# EAGLE board PM_DC_v0.2 (EAGLE 9.6.2)
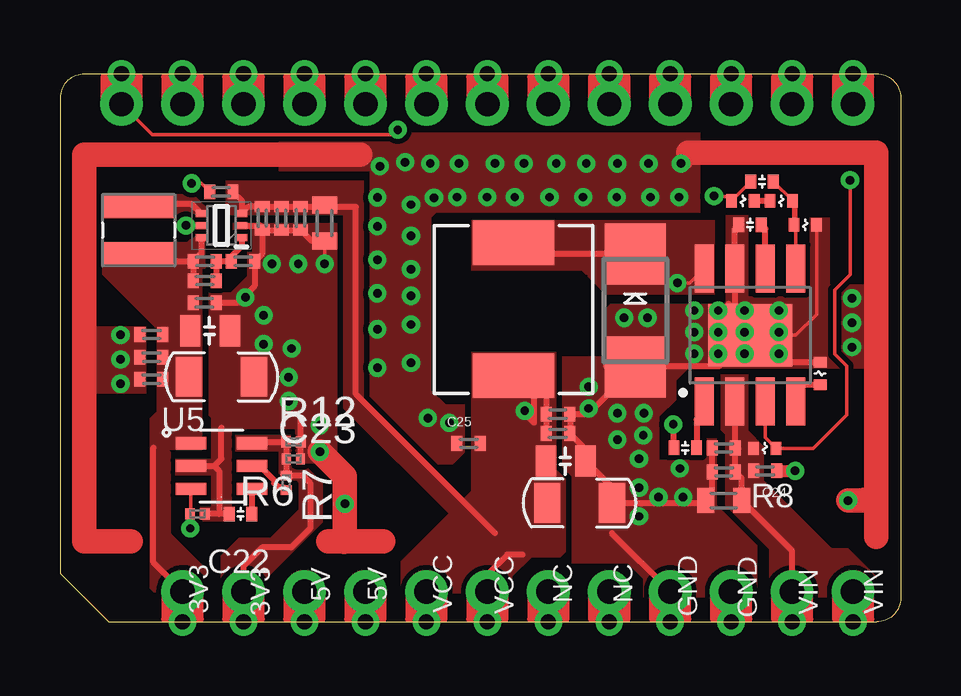
[diagram p0: board, top side]
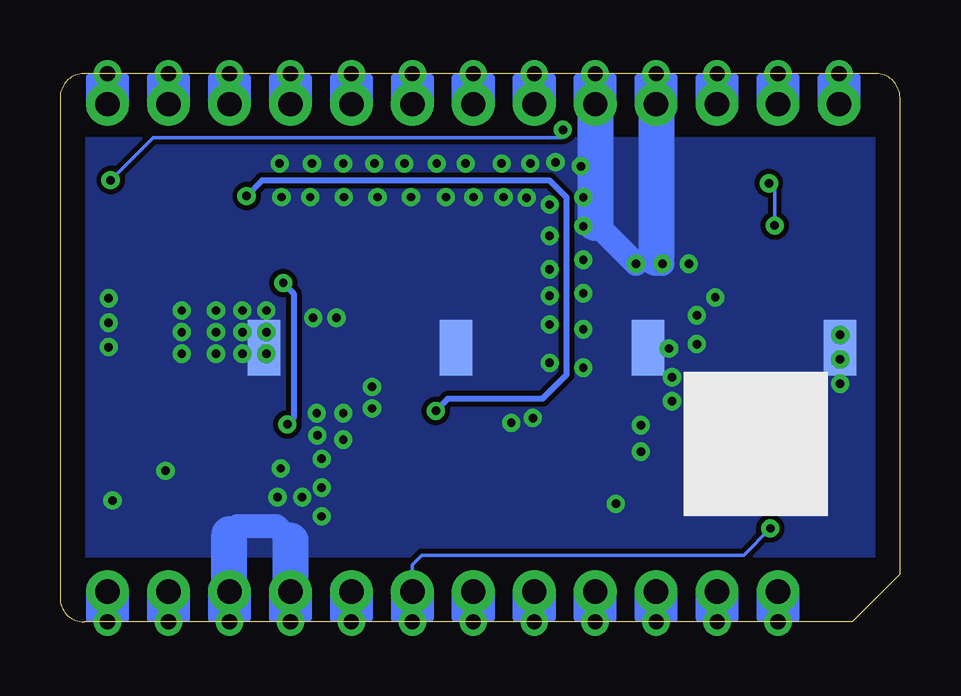
[diagram p1: board, bottom side, seen from below]

Size 35 x 22.86 mm. Coordinates in mm from the lower left corner, seen from the top.
Outline: 2,0 34,0 arc90 35,1 35,21.86 arc90 34,22.86 1,22.86 arc90 0,21.86 0,2 2,0
Copper layers (1*16): Top 0.035mm / dielectric 1.5mm / Bottom 0.035mm
Design rules "default *": minimum track width 6mil, minimum drill 12mil, track to track 8mil, track to pad 6mil, pad to pad 6mil, via to via 6mil, smd to smd 6mil, copper to edge 40mil, drill to drill 6mil, minimum pad ring 10mil, minimum via ring 8mil, stop-mask expansion 4mil, vias tented up to drill 20mil, thermal gap 10mil
Net classes: 0 default: width 0.152 mm, drill 0.203 mm, clearance 0.152 mm; 1 power: width 0.254 mm, drill 0.61 mm, clearance 0.203 mm; 3 BAT: clearance 0.203 mm; 4 3V3: width 0.305 mm, clearance 0.508 mm; 6 +3V3: width 0.203 mm, clearance 0.152 mm

## Footprints (pad centres in the part's own frame; a part is rotated, then mirrored left to right if it is on the bottom)
C0402 = smd 0.45 x 0.6: 1 -0.47,0; 2 0.47,0
C0603_B = smd 0.711 x 1.041: 1 -0.749,0; 2 0.749,0
C0402_B = smd 0.457 x 0.61: 1 -0.483,0; 2 0.483,0
C0805 = smd 0.85 x 1.3: 1 -0.8,0; 2 0.85,0
C1206 = smd 1.1 x 1.65: 1 -1.35,0; 2 1.35,0
C0201-N = smd 0.37 x 0.45: 1 -0.295,0; 2 0.295,0
SMADIODE = smd 2.54 x 2.54: A 2.349,0; C -2.349,0
1X13-CASTELLATED = drill 1.016 pad 1.778: 1 0,-15.24; 2 0,-12.7; 3 0,-10.16; 4 0,-7.62; 5 0,-5.08; 6 0,-2.54; 7 0,0; 8 0,2.54; 9 0,5.08; 10 0,7.62; 11 0,10.16; 12 0,12.7; 13 0,15.24 | drill 0.635 pad 1.016: @1 1.27,-15.24; @2 1.27,-12.7; @3 1.27,-10.16; @4 1.27,-7.62; @5 1.27,-5.08; @6 1.27,-2.54; @7 1.27,0; @8 1.27,2.54; @9 1.27,5.08; @10 1.27,7.62; @11 1.27,10.16; @12 1.27,12.7; @13 1.27,15.24
1X12-CASTELLATED = drill 1.016 pad 1.778: 1 0,-13.97; 2 0,-11.43; 3 0,-8.89; 4 0,-6.35; 5 0,-3.81; 6 0,-1.27; 7 0,1.27; 8 0,3.81; 9 0,6.35; 10 0,8.89; 11 0,11.43; 12 0,13.97 | drill 0.635 pad 1.016: @1 1.27,-13.97; @2 1.27,-11.43; @3 1.27,-8.89; @4 1.27,-6.35; @5 1.27,-3.81; @6 1.27,-1.27; @7 1.27,1.27; @8 1.27,3.81; @9 1.27,6.35; @10 1.27,8.89; @11 1.27,11.43; @12 1.27,13.97
INDUCTOR-VLS-E = smd 1 x 3: P$1 -1,0; P$2 1,0
INDCUTOR_SPM6530 = smd 1.85 x 3.4: 1 -2.775,0; 2 2.775,0
R0402_B = smd 0.457 x 0.61: 1 -0.483,0; 2 0.483,0
R-0402S = smd 0.45 x 0.55: 1 -0.47,0; 2 0.47,0
R0201-N = smd 0.4 x 0.45: 1 -0.305,0; 2 0.305,0
SO_POWERPAD_8 = smd 0.8 x 2: 1 -1.905,-2.775; 2 -0.635,-2.775; 3 0.635,-2.775; 4 1.905,-2.775; 5 1.905,2.775; 6 0.635,2.775; 7 -0.635,2.775; 8 -1.905,2.775 | smd 3.5 x 2.6: EP 0,0
SOTFL50P160X60-6N = smd 0.475 x 0.3: 1 -0.838,0.5; 2 -0.838,0; 3 -0.838,-0.5; 4 0.838,-0.5; 5 0.838,0; 6 0.838,0.5
SOT-23-6 = smd 1.27 x 0.508: 1 -1.27,0.953; 2 -1.27,0; 3 -1.27,-0.953; 4 1.27,-0.953; 5 1.27,0; 6 1.27,0.953
TP_2.33X1.37 = smd 1.37 x 2.33: 1 0,0

## Placement (x,y rotation side)
C1  0.1uF  [C0402]  26.03,7.26 180 top
C2  10uF  [C0603_B]  11,16.63 270 top
C3  33pF  [C0402_B]  3.78,10.11 0 top
C4  0.027uF  [C0402]  28.73,16.56 180 top
C5  22UF  [C0805]  21.03,6.71 0 top
C6  0.1uF  [C0402_B]  10,16.83 90 top
C7  0.1uF  [C0402_B]  6,13.3 180 top
C8  NC-33pF  [C0402]  29.23,18.36 180 top
C9  0.1uF  [C0402_B]  27.63,6.26 0 top
C10  1000pF  [C0402_B]  27.63,7.26 0 top
C11  0.1uF  [C0402_B]  20.73,8.66 180 top
C12  1000pF  [C0402_B]  20.73,7.86 180 top
C13  nc  [C0402_B]  6,14.23 0 top
C14  10uF  [C0805]  6.2,12.14 0 top
C15  100uF  [C1206]  6.7,10.22 0 top
C16  22uF  [C0603_B]  27.63,5.06 180 top
C17  100uF  [C1206]  21.63,4.96 0 top
C18  100pF  [C0402_B]  3.78,11.98 0 top
C19  1000pF  [C0402_B]  8.4,16.83 90 top
C20  100pF  [C0402_B]  9.2,16.83 90 top
C21  1nF  [C0402_B]  3.78,11.04 0 top
C22  1000pF,25V  [C0402]  7.5,4.5 180 top
C23  0.1uF  [C0201-N]  9.7,6.8 0 top
C24  10pF  [C0402_B]  29.37,6.3 180 top
C25  10pF  [C0402_B]  17,7.44 0 top
D2  5A/0.55V  [SMADIODE]  23.95,12.98 270 top
J1  M13PTH-CST-R  [1X13-CASTELLATED]  17.78,21.59 90 top
J2  M12PTH-CST-R  [1X12-CASTELLATED]  19.05,1.27 270 top
L2  1uH  [INDUCTOR-VLS-E]  3.25,16.33 270 top
L4  SPM6530T-2R2M  [INDCUTOR_SPM6530]  18.88,13.03 270 top
R1  44.2K  [R0402_B]  7.6,15.03 0 top
R2  12K  [R-0402S]  31.65,10.36 270 top
R3  82K  [R-0402S]  28.43,17.56 180 top
R4  82K  [R-0402S]  30.03,17.56 180 top
R5  39.2K  [R-0402S]  31.03,16.56 180 top
R6  100K  [R0201-N]  5.7,4.5 0 top
R7  10K  [R0201-N]  9.4,5.8 270 top
R8  12K  [R-0402S]  29.34,7.24 180 top
R11  10K  [R0402_B]  6.7,17.93 180 top
R12  10K/NC  [R0201-N]  9.7,7.5 0 top
R58  200K  [R0402_B]  6,15.03 0 top
U2  LMR14030  [SO_POWERPAD_8]  28.73,11.96 0 top
U3  MP1601GTF-Z  [SOTFL50P160X60-6N]  6.7,16.53 180 top
U5  TPS22918  [SOT-23-6]  6.7,6.5 0 top
U$1  TP  [TP_2.33X1.37]  10.5,11.43 0 bottom
U$2  TP  [TP_2.33X1.37]  2.5,11.43 0 bottom
U$4  TP  [TP_2.33X1.37]  26.5,11.43 0 bottom
U$5  TP  [TP_2.33X1.37]  18.5,11.43 0 bottom

## Library data of the parts
C1 C4 C5 C8 C14 C15 C17 R2-R5 R8 U5 = particle SZ
C2 C16 = Bretts-Spark-Library
C3 C6 C7 C9-C13 C18-C21 C24 C25 J1 J2 L2 R1 R58 U$1 U$2 U$4 U$5 = Particle
C22 = particle SZ; ITEM_NAME: CAP CER 100PF 50V C0G/NP0 0603 5%; ITEM_NUMBER: PT-200458
C23 = particle SZ; ITEM_NAME: 0.1UF 16V X7R 0402 10%; ITEM_NUMBER: PT-200649
D2 L4 U2 = particle-studios
R6 = particle SZ; ITEM_NAME: RES SMD 1M OHM 1% 1/16W 0402; ITEM_NUMBER: PT-201084
R7 R12 = particle SZ; ITEM_NAME: 10K OHM 5% 1/16W 0402; ITEM_NUMBER: PT-200004
R11 = Spark
U3 = MP1601GTF-Z; DESCRIPTION: Conv DC-DC Single Step Down 2.3V to 5.5V 6-Pin SOT-563 T/R - Tape and Reel; HEIGHT: 0.6mm; MANUFACTURER_NAME: Monolithic Power Systems (MPS); MANUFACTURER_PART_NUMBER: MP1601GTF-Z

## Nets
3V3_AUX: C23.1 J2.2 J2.@2 R7.1 R12.1 U5.6
+3V3: C3.2 C7.2 C13.1 C14.1 C15.1 C18.2 C21.2 J2.1 J2.@1 L2.P$2 R58.1 U3.6 U5.1
EN_AUX: J2.7 J2.@7 R6.1 U5.3
ENABLE: J1.13 J1.@13 R8.1 U2.3
FB: C13.2 R1.1 R58.2 U3.1
GND: C2.2 C3.1 C4.2 C5.2 C6.1 C7.1 C9.1 C10.1 C11.1 C12.1 C14.2 C15.2 C16.2 C17.2 C18.1 C19.1 C20.1 C21.1 C22.2 C23.2 C24.1 C25.1 D2.A J1.9 J1.10 J1.@9 J1.@10 J2.9 J2.10 J2.@9 J2.@10 R1.2 R2.1 R5.1 R6.2 R12.2 U2.7 U2.EP U3.2 U5.2 U$1.1 U$2.1 U$4.1 U$5.1
N$1: R7.2 U5.5
N$2: C8.1 R4.1 R5.2 U2.5
N$3: R11.2 U3.5
N$8: C4.1 U2.6
N$9: C1.2 D2.C L4.1 U2.8
N$10: C1.1 U2.1
N$11: R2.2 U2.4
N$12: R3.1 R4.2
N$18: C22.1 U5.4
SW: L2.P$1 U3.4
VCC: C2.1 C5.1 C6.2 C8.2 C11.2 C12.2 C17.1 C19.2 C20.2 C25.2 J2.5 J2.6 J2.@5 J2.@6 L4.2 R3.2 R11.1 U3.3
VIN: C9.2 C10.2 C16.1 C24.2 J2.11 J2.12 J2.@11 J2.@12 R8.2 U2.2

## Tracks (layer width: path | path; a pad name or v marks a point on that pad's centre or on a via)
3V3_AUX
  Top 0.152: J2.@2 J2.2
  Top 0.254: U5.6 8.02,7.5 R12.1 R7.1 10.1,6.11 10.4,5.8 10.4,3.9 9.6,3.1 8.4,3.1 7.62,2.32 J2.2
  Bottom 0.508: J2.2 J2.@2
  pour Top (no thermals): 7.3,7.8 9.6,7.8 9.6,6.4 10.3,6.4 10.9,5.8 10.9,4.15 8.05,1.3 6.7,1.3 6.7,2.75 7.45,3.5 8.75,3.5 9.95,4.7 9.95,5.8 9.85,5.9 9.2,5.9 9.1,6 9.1,7.1 7.3,7.1
+3V3
  Top 0.254: U3.6 5.87,15.38 R58.1 | R58.1 C13.1 | R58.1 3.55,15.03 L2.P$2 | R58.1 5.56,14.99 | 5.35,7.53 U5.1 | J2.1 3.87,2.49 3.87,7.26
  Bottom 0.508: J2.1 J2.@1
  pour Top (no thermals): 1.76,15.83 5.3,15.83 5.6,16.13 6,16.13 6,14.73 1.76,14.73
  pour Top (no thermals): 1.5,14.73 4,12.23 4,7.2 5.9,7.2 5.9,14.73
  pour Top (no thermals): 4,8.7 3.77,8.47 3.77,1.43 4.2,1 6,1 6,2.2 4.53,3.67 4.53,7.07 4,7.6
CUT1
  cutout Top: 1.5,16.73 4.7,16.73 4.7,15.93 1.5,15.93
CUT2
  cutout Top: 17.03,14.46 21.93,14.46 21.93,11.36 17.03,11.36
  cutout Top: 16.03,9.46 16.03,16.76 17.03,16.76 17.03,9.46
EN_AUX  (via drill 0.35)
  Top 0.152: U5.3 5.43,4.54 R6.1 v5.4,3.9
  Bottom 0.152: v5.4,3.9 6.52,2.78 19.92,2.78 20.32,2.38 J2.7
  Bottom 0.508: J2.7 J2.@7
ENABLE  (via drill 0.35)
  Top 0.152: U2.3 29.37,7.68 R8.1 31.37,7.24 32.77,8.64 32.77,10.67 32.26,11.18 32.26,13.84 32.9,14.48 v32.9,18.41 | v14.05,20.52 13.85,20.32 3.81,20.32 J1.13
  Top 0.254: 3.21,21.59 J1.13
  Bottom 0.152: v32.9,18.41 31.12,20.19 14.05,20.19 v14.05,20.52
  Bottom 0.508: J1.@13 J1.13
FB
  Top 0.152: 7.12,15.24 R1.1
  Top 0.254: U3.1 7.54,15.66 7.12,15.24 | R1.1 R58.2 C13.2
GND  (via drill 0.35)
  Top 0.152: 27.15,6.36 C9.1 | 9.15,16.35 C20.1 | 27.81,12.21 28.06,11.96 28.33,11.96 | C5.2 21.88,6.76 21.88,6.95 | R5.1 31.5,12.83 30.63,11.96 U2.EP | C2.2 v11,14.93 | 10.16,21.76 J1.10 | 12.7,21.76 J1.9
  Top 0.254: R2.1 29.86,10.83 U2.EP | 30.2,11.96 U2.EP | C4.2 28.1,16.39 U2.7 28.09,13.02 27.83,13.27 27.83,12.86 U2.EP | 22.97,3.7 J2.9 | D2.A 23.8,10.49 | 23.8,10.49 21.97,8.66 C11.1 21.24,8.63 21.24,7.83 | C12.1 21.88,7.19 21.88,6.76 | C5.2 22.98,5.61 C17.2 26.79,4.96 | 27.15,5.32 27.15,6.36 | C9.1 C10.1 | U2.EP 27.43,10.66 22.73,10.66 22.9,10.49 23.8,10.49 | C22.2 6.6,4.5 | 6.6,4.5 R6.2 | U5.2 6.4,6.5 | 6.4,6.5 6.6,6.3 6.6,4.5 | 6.4,6.5 6.7,6.8 6.7,8.1 | 10,8.4 C23.2 | 8.5,16.35 C19.1 8.4,15.35 R1.2 8.09,14.01 7.38,13.3 C7.1 | 8.5,16.35 C6.1 10.47,15.88 C2.2 | U3.2 8.32,16.53 8.5,16.35
  Top 0.305: C19.1 8.38,16.32 | C20.1 9.15,16.3
  Top 0.406: 27.15,6.14 C9.1 | C2.2 11.09,15.79 | 21.24,7.83 C12.1
  Top 0.508: C2.2 10.95,15.83 | U2.EP 28.66,11.88 | C24.1 v30.61,6.3
  Top 0.762: v25.85,19.11 26.17,19.42 26.17,19.56
  Top 0.813: C17.2 22.98,4.55
  Top 1.016: U2.EP 28.33,11.96 27.77,11.96 | 26.17,19.56 33.98,19.56 33.98,3.56 | 2.93,3.35 1,3.35 1,19.48 12.49,19.48 | v10.8,7.1 11.84,6.06 11.84,3.35 | 11.82,3.33 11.84,3.35 | 13.44,3.35 11.84,3.35 | 11.84,3.35 11.16,3.35 | v32.82,5.06 33.46,5.06 33.48,5.08
  Bottom 0.508: J1.@10 J1.10 | J1.@9 J1.9 | J2.9 J2.@9 | J2.10 J2.@10
  Bottom 1: 10.16,15.19 v9.9,14.93 | 12.7,16.63 v11,14.93 | 25.4,3.4 26,4 27.6,4 27.94,3.66
  Bottom 1.5: J1.10 10.16,15.19 | J1.9 12.7,16.63 | J2.10 27.94,3.66 | 25.4,3.4 25.4,1.52
  other vias: 8.8,14.93 7.7,13.53 8.47,12.78 8.47,11.58 9.63,11.4 9.5,10.2 9.5,9.2 10.8,8.2 24.1,4.4 24.1,5.6 24.1,6.8 23.2,7.6 23.2,8.7 24.3,8.7 24.28,7.78 25.8,6.4 24.92,5.2 25.94,5.2 28.5,12.98 28.5,11.18 27.4,11.18 27.4,12.08 27.4,12.98 29.93,12.98 29.93,12.08 29.93,11.18 23.49,12.68 24.46,12.68 26.4,12.98 26.4,12.08 26.4,11.18 22,9.8 22,8.9 28.5,12.08 25.78,17.71 24.58,17.71 23.18,17.71 21.78,17.71 20.38,17.71 18.93,17.71 17.78,17.71 16.53,17.71 15.56,17.69 14.6,17.4 14.6,16.1 14.6,14.7 14.6,13.6 14.6,12.4 14.6,10.8 16.2,8.3 15.3,8.5 14.36,19.16 24.5,19.11 23.2,19.11 19.3,19.11 16.6,19.11 13.2,16.5 13.2,15.1 13.2,13.7 13.2,12.2 13.2,10.6 13.2,17.7 13.3,19 21.9,19.11 20.65,19.11 18.1,19.11 15.4,19.11 2.5,11.96 2.5,10.95 2.5,9.93 32.98,13.49 32.98,12.48 32.98,11.46 11.85,4.92
  pour Top (no thermals): 22.63,12.96 22.93,13.26 27.63,13.26 27.73,13.36 27.73,16.96 28.63,16.96 28.63,13.56 31.23,13.56 31.73,14.06 33.8,14.06 33.8,10.56 26.13,10.56 25.63,10.06 25.63,9.26 24.93,8.56 24.93,6.76 26.73,6.76 26.83,6.86 26.83,7.66 27.33,7.66 27.33,4.87 29,3.2 29,0.8 24.4,0.8 24.3,0.9 24.3,1.8 23.65,2.45 21.33,2.45 21.33,6.06 20.93,6.46 22.63,11.06
  pour Top (no thermals): 20.93,6.46 20.93,11.06 22.73,11.06 22.73,6.46
  pour Top (no thermals): 7.2,16.63 11.5,16.63 11.5,6.6 9.8,6.6 9.8,8.05 6.76,8.05 6.2,8.6 6.2,13.73 7.1,13.73 7.8,14.43 7.8,15.43 8,15.43 8,16.33 7.2,16.33
  pour Top (no thermals): 4.8,6.8 6.3,6.8 6.3,8.6 7,8.6 7.1,8.5 7.1,4.2 5.8,4.2 5.8,4.8 6.3,4.8 6.3,6.1 4.8,6.1
  pour Top (no thermals): 31.23,16.86 32.03,16.86 32.03,13.56 31.23,13.56
  pour Top (no thermals): 9.1,20.4 26.63,20.4 26.63,17.06 15.63,17.06 15.43,16.86 15.43,9.66 16.03,9.06 16.83,9.06 16.83,7.06 16.33,6.56 15.53,6.56 12.9,9.18 12.9,18.79 9.1,18.79
  pour Bottom (no thermals): 0,20.15 35,20.15 35,2.75 0,2.75
  pour Top (no thermals): 1.15,12.32 3.56,12.32 3.56,9.53 1.15,9.53
N$1
  Top 0.254: R7.2 9.27,5.63 9.06,5.63 8.9,5.79 8.9,5.91 8.31,6.5 U5.5
N$2
  Top 0.152: C8.1 R4.1 30.56,17.5 | 30.56,17.5 30.64,17.42 U2.5 | R5.2 30.56,17.5
  Top 0.254: U2.5 | 29.7,18.26 C8.1
N$3  (via drill 0.35)
  Top 0.152: U3.5 v5.23,16.53 | v5.47,18.29 5.86,18.29 R11.2
  Bottom 0.152: v5.23,16.53 5.23,18.05 v5.47,18.29
N$8
  Top 0.152: U2.6 29.17,14.54 29.4,14.54
  Top 0.254: U2.6 29.37,16.39 C4.1
N$9  (via drill 0.35)
  Top 0.152: 26.83,13.98 U2.8 26.23,14.13 v25.7,14.13 25.15,14.13 D2.C | L4.1
  Top 0.254: C1.2 25.53,7.29 v25.53,8.24 | D2.C 19.36,15.33 L4.1
  Bottom 0.254: v25.53,8.24 25.27,8.5 25.27,13.69 v25.7,14.13 25.7,14.26
  pour Top (no thermals): 17.13,16.76 27.23,16.76 27.23,13.66 22.73,13.66 21.73,14.66 17.13,14.66
N$10
  Top 0.254: U2.1 26.83,8.75 26.5,8.43 C1.1
  Top 0.508: U2.1 26.83,8.43
N$11
  Top 0.152: 30.64,9.21 U2.4
  Top 0.254: R2.2 30.6,9.89 30.53,9.96 30.53,9.29 U2.4
N$12
  Top 0.254: R3.1 R4.2
N$18
  Top 0.254: U5.4 C22.1
SW
  Top 0.254: U3.4 5.47,17.43 3.35,17.43 L2.P$1
  pour Top (no thermals): 1.76,17.83 5.51,17.83 6.1,17.23 6.1,16.93 5.6,16.93 5.5,17.03 4.9,17.03 4.7,16.83 1.76,16.83
VCC  (via drill 0.35)
  Top 0.152: C8.2 R3.2 27.79,17.73 27.26,17.73
  Top 0.254: 27.96,17.66 R3.2 | 27.26,17.73 v27.23,17.76 | v19.34,8.8 19.34,8.68 19.73,8.3 19.73,10.46 20.25,9.94 C12.2 | 19.25,2.8 18.6,2.8 17.78,1.98 J2.6 | 18.1,3.7 12.3,9.5 12.3,17.31 C20.2 C19.2 7.83,17.31 U3.3 7.54,17.57 R11.1
  Bottom 0.254: v19.34,8.8 18.84,9.3 14.9,9.3 13.9,10.3 13.9,17.71 14.61,18.41 26.58,18.41 v27.23,17.76
  Bottom 0.508: J2.6 J2.@6 | J2.5 J2.@5
  pour Top (no thermals): 17.13,11.26 20.63,11.26 20.63,6.36 21.03,5.96 21.03,2.93 20.8,2.7 19.6,2.7 18.8,1.9 18.8,1.2 14.2,1.2 14.2,2.53 17.13,5.46
  pour Top (no thermals): 6.9,18.39 12.6,18.39 12.6,8.98 17.3,4.29 16.42,4.29 11.8,8.9 11.8,16.96 6.9,16.96
VIN
  Top 0.254: J2.11 30.48,2.95 C16.1 28.38,5.99 C9.2 C10.2 28.11,9.16 U2.2
  Top 0.508: C10.2 28.11,7.2 | C16.1
  Bottom 0.508: J2.11 J2.@11 | J2.12 J2.@12
  pour Top (no thermals): 27.54,10.31 28.63,10.31 28.63,7.98 29.29,7.32 29.29,5.89 32.11,3.07 32.8,3.07 34.04,1.83 34.04,0.81 29.6,0.81 29.54,0.86 29.54,3.02 27.72,4.85 27.72,7.82 27.54,8

## Text on the board
tPlace: 5V | 5V | NC | NC | 3V3 | 3V3 | VCC | VCC | GND | GND | VIN | VIN